# EAGLE board Epic Lahdi-Densor (EAGLE 9.7.0)

Size 118.09 x 138.5 mm. Coordinates in mm from the lower left corner, seen from the top.
Outline: 0,0 118.09,0 118.09,138.5 0,138.5 0,0
Copper layers (1*16): Top 0.035mm / dielectric 1.5mm / Bottom 0.035mm
Design rules "default": minimum track width 6mil, minimum drill 0.35mm, track to track 6mil, track to pad 6mil, pad to pad 6mil, via to via 6mil, smd to smd 6mil, copper to edge 40mil, drill to drill 6mil, minimum pad ring 10mil, minimum via ring 8mil, stop-mask expansion 4mil, vias tented up to drill 0mil, thermal gap 10mil

## Footprints (pad centres in the part's own frame; a part is rotated, then mirrored left to right if it is on the bottom)
LU-5-R = drill 0.8: 1 -6.35,-3.81; 5 3.81,-3.81; 6 6.35,-3.81; 7 6.35,3.81; 8 3.81,3.81; 12 -6.35,3.81
1X02 = drill 1.016 long: 1 -1.27,0; 2 1.27,0
BATTERY-GENERIC = drill 1.118 pad 3.15 octagon: + 2.54,0; - -2.54,0
ARDUINO-UNO-R3-SHIELD = drill 1.016 pad 1.88: 3.3V 24.13,-2.54; 5V 24.13,0; A0 24.13,12.7; A1 24.13,15.24; A2 24.13,17.78; A3 24.13,20.32; A4 24.13,22.86; A5 24.13,25.4; AREF -24.13,-13.97; D2 -24.13,20.32; D3 -24.13,17.78; D4 -24.13,15.24; D5 -24.13,12.7; D6 -24.13,10.16; D7 -24.13,7.62; D8 -24.13,3.81; D9 -24.13,1.27; D10 -24.13,-1.27; D11 -24.13,-3.81; D12 -24.13,-6.35; D13 -24.13,-8.89; GND@0 24.13,2.54; GND@1 24.13,5.08; GND@2 -24.13,-11.43; IOREF 24.13,-7.62; NC 24.13,-10.16; RES 24.13,-5.08; RX -24.13,25.4; SCL -24.13,-19.05; SDA -24.13,-16.51; TX -24.13,22.86; VIN 24.13,7.62

## Placement (x,y rotation side)
K1  RELAY-SPDT_LU-5-R  [LU-5-R]  53.82,97.42 180 top
K2  RELAY-SPDT_LU-5-R  [LU-5-R]  81.76,97.42 180 top
K3  RELAY-SPDT_LU-5-R  [LU-5-R]  107.16,97.42 180 top
L1  LIGHTBULB  [1X02]  53.82,121.55 0 top
L2  LIGHTBULB  [1X02]  76.68,121.55 0 top
L3  LIGHTBULB  [1X02]  102.08,121.55 0 top
P1  BATTERYGENERIC  [BATTERY-GENERIC]  8.26,130.25 270 top
U1  ARDUINO-UNO-R3-SHIELD  [ARDUINO-UNO-R3-SHIELD]  66.11,29.84 270 top

## Library data of the parts
K1-K3 L1-L3 P1 U1 = Tinkercad

## Nets
K1_COIL1: K1.5 K1.8
K1_COM2: K1.1 K1.12
K1_NC: K1.6 K1.7
K2_COIL1: K2.5 K2.8
K2_COM2: K2.1 K2.12
K2_NC: K2.6 K2.7
K3_COIL1: K3.5 K3.8
K3_COM2: K3.1 K3.12
K3_NC: K3.6 K3.7
U1_D3: U1.D3 U1.TX
U1_D13: U1.D5 U1.D10 U1.D11 U1.D12 U1.D13

## Tracks (layer width: path | path; a pad name or v marks a point on that pad's centre or on a via)
K1_COIL1  (1 unrouted)
K1_COM2  (1 unrouted)
K1_NC  (1 unrouted)
K2_COIL1  (1 unrouted)
K2_COM2  (1 unrouted)
K2_NC  (1 unrouted)
K3_COIL1  (1 unrouted)
K3_COM2  (1 unrouted)
K3_NC  (1 unrouted)
U1_D3  (1 unrouted)
U1_D13  (4 unrouted)